# Altium PCB USB_UART_JTAG.PcbDoc
Units mm, origin at the board's own origin, x right, y up, seen from the top; angles counter-clockwise.
Board outline 45 x 40 mm, 2 copper layers (Top Layer, Bottom Layer), stack 1.07 mm thick; 67 components, 49 nets, 247 pads, 152 vias.
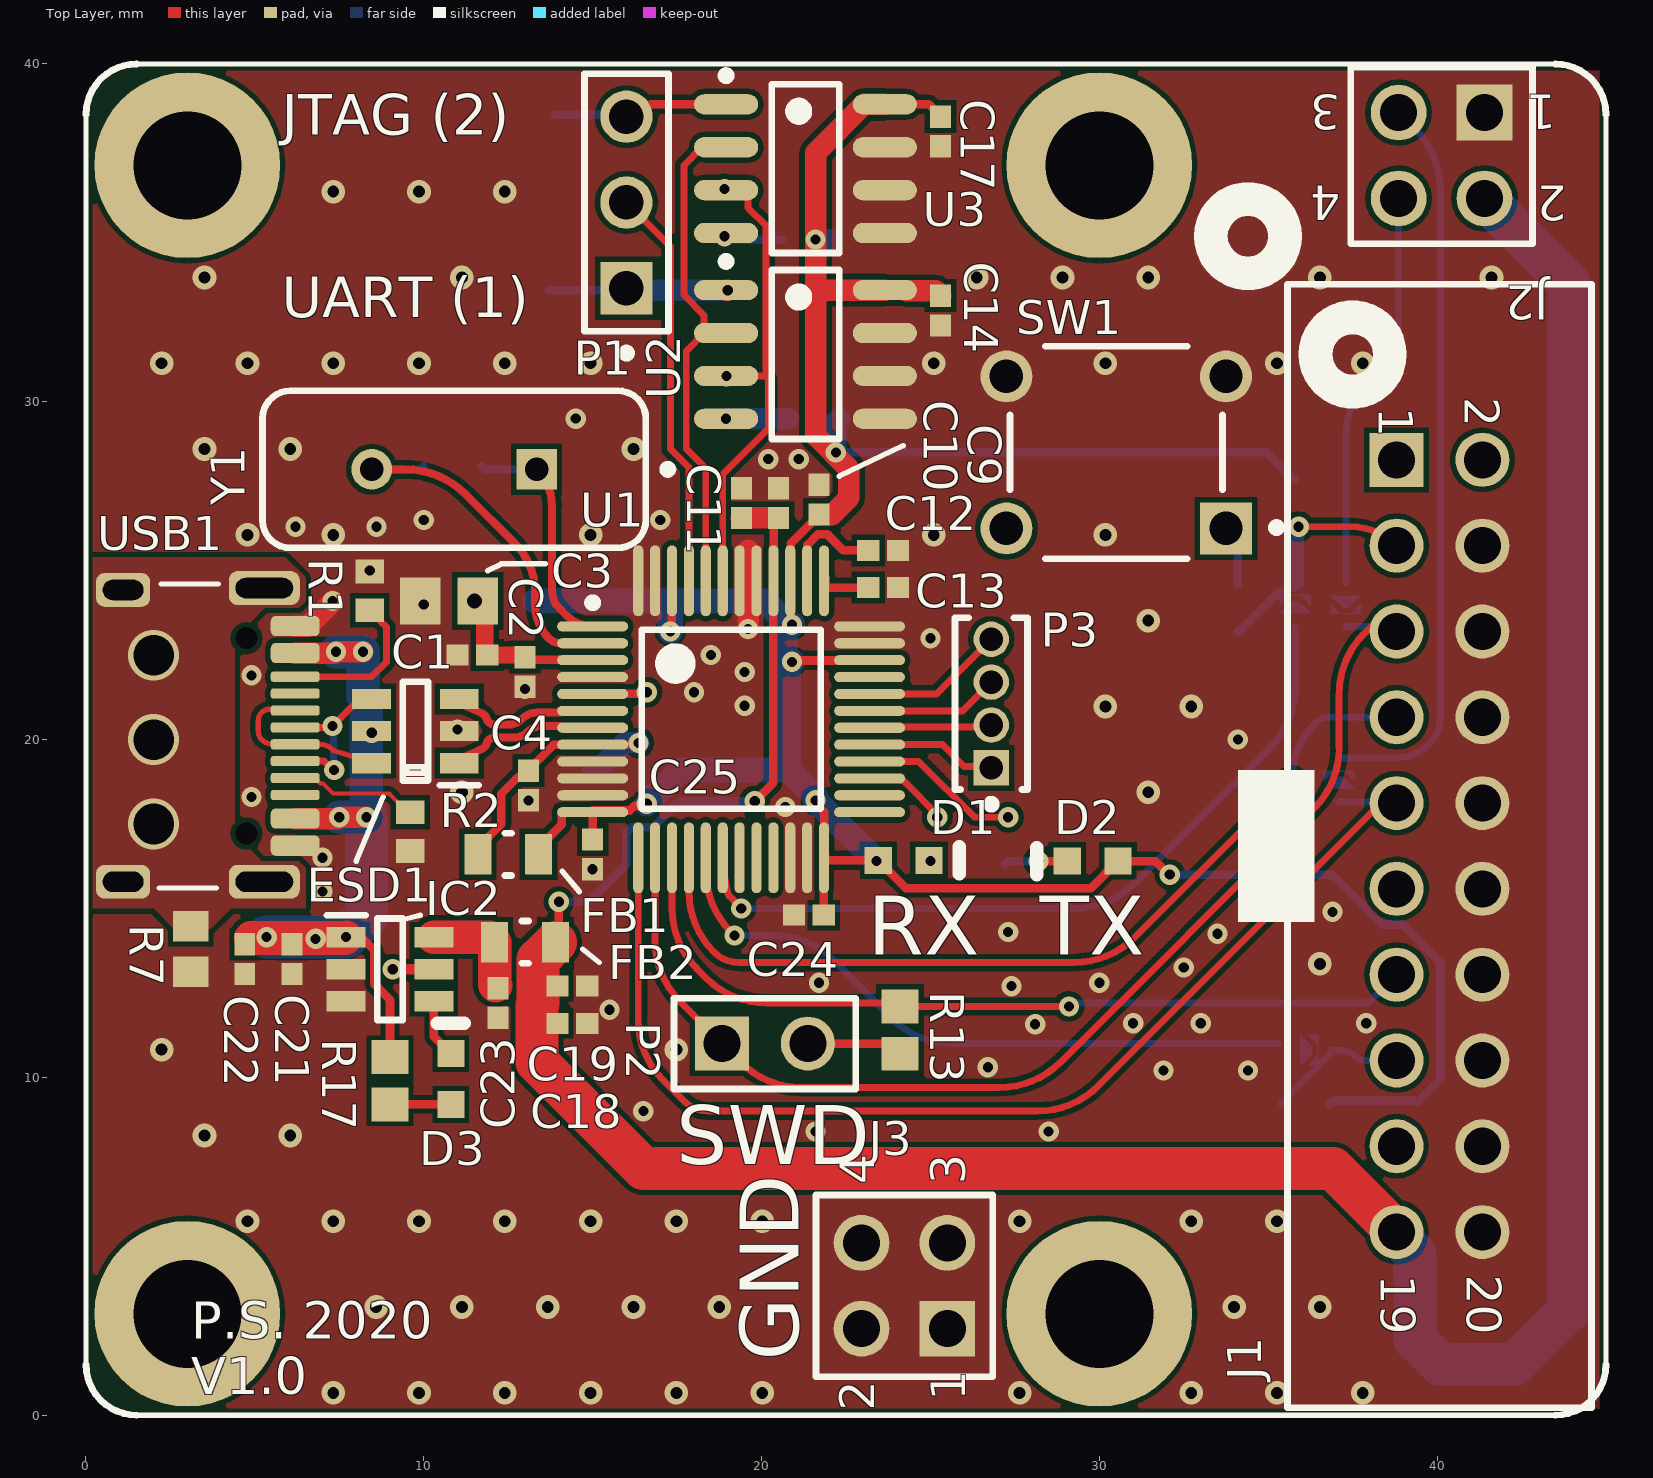
[diagram p0: Top Layer view]
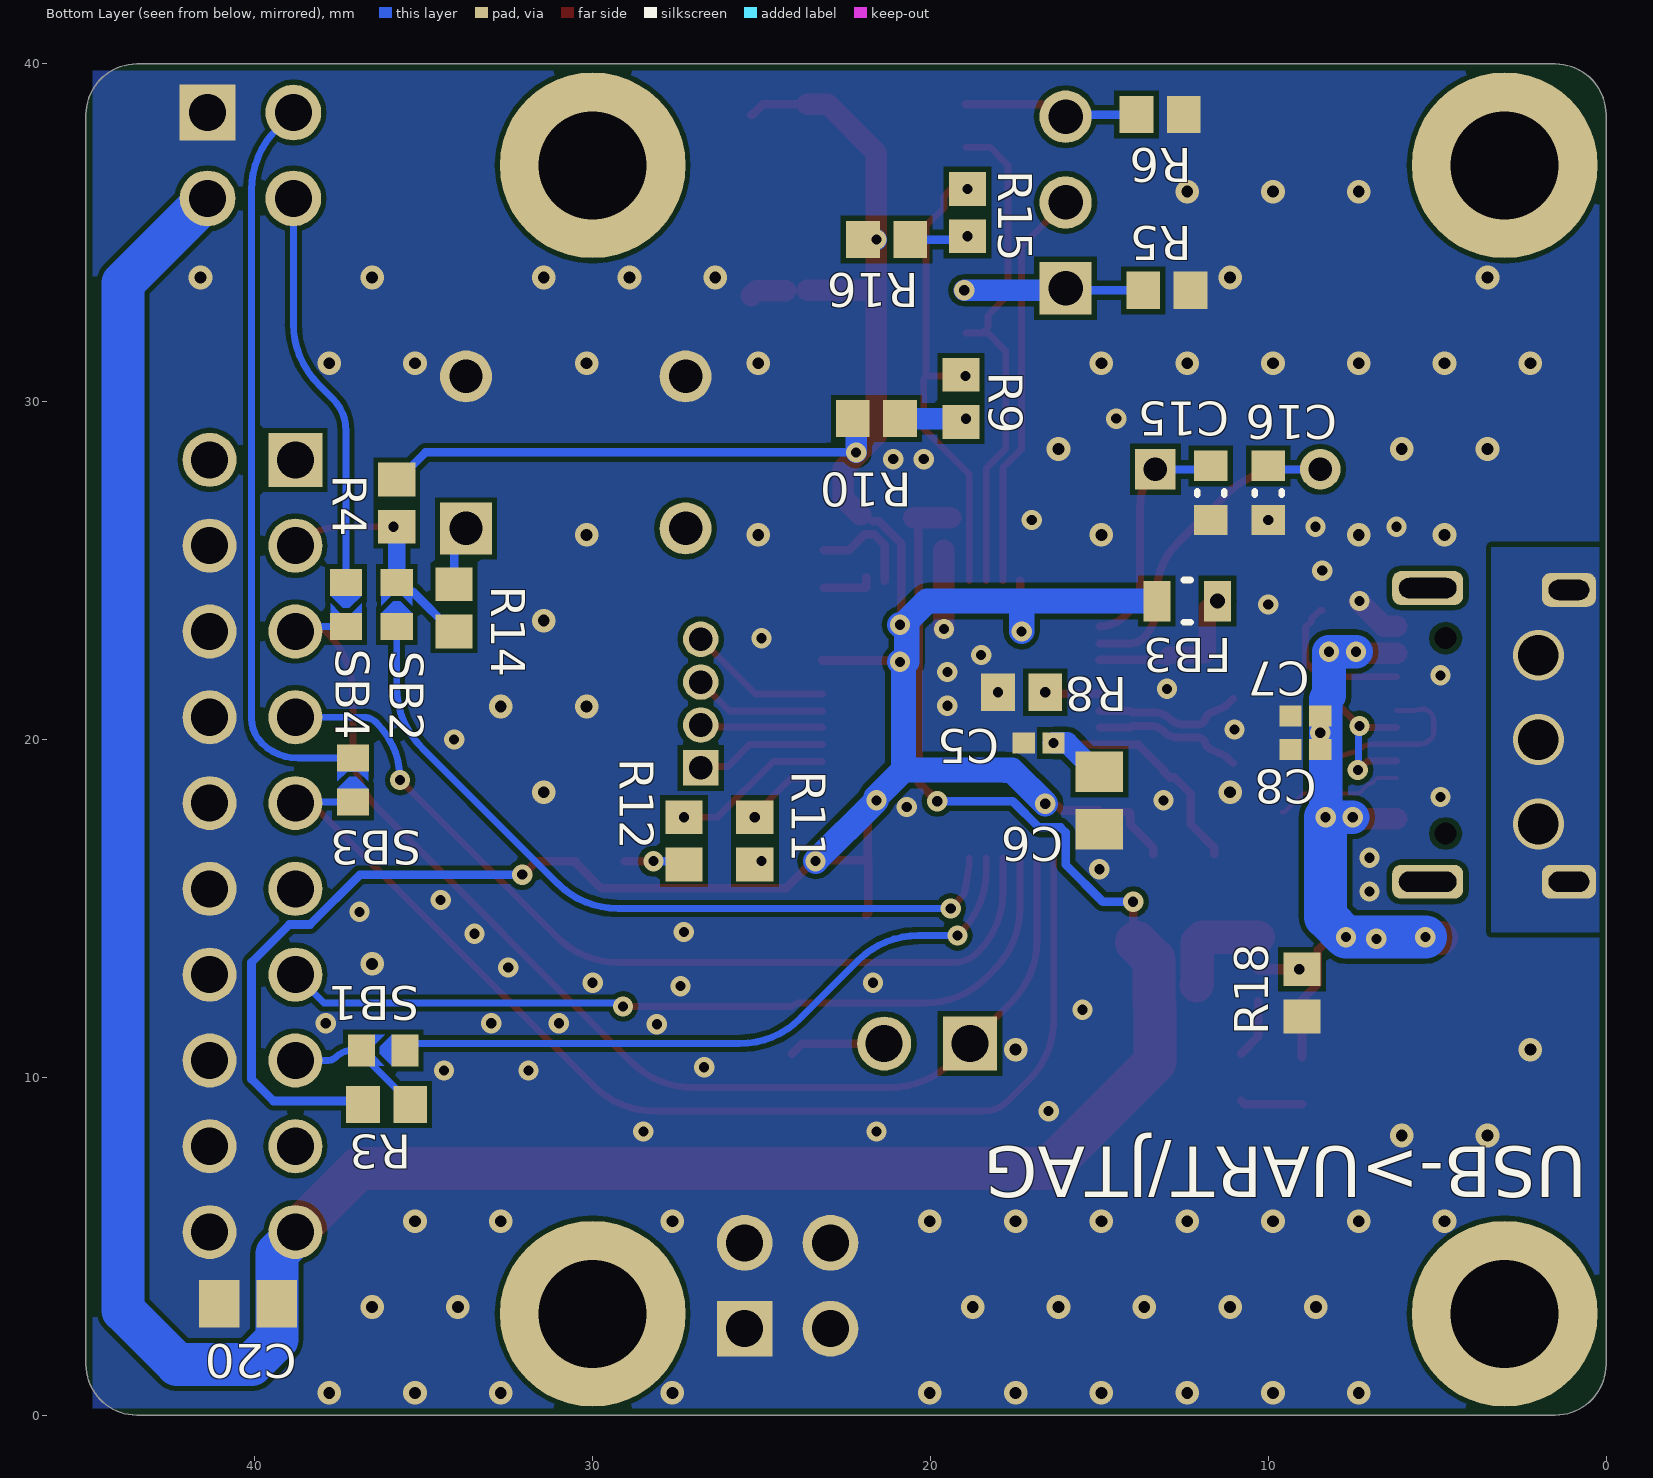
[diagram p1: Bottom Layer view, seen from below]

## Layer stack, top to bottom
Top Solder: solder mask 0.3175, Solder Resist, Dk 3.8
Top Layer: signal copper 0.035
Dielectric 1: dielectric 1, FR-4, Dk 4.5
Bottom Layer: signal copper 0.035
Bottom Solder: solder mask 0.3175, Solder Resist, Dk 3.8

## Board outline
0,1.5 0,38.5 cw(c1.5,38.5) 1.5,40 43.5,40 cw(c43.5,38.5) 45,38.5 45,1.5 cw(c43.5,1.5) 43.5,0 1.5,0 cw(c1.5,1.5)

## Design rules (kind name [scope] priority, off if disabled: settings)
BoardOutlineClearance [All] p1: gap=0.2 ignorepadtopadclearanceinfootprint=FALSE except(0.4: Arc-SplitBarrior Arc-SplitContinuation Track-SplitBarrior Track-SplitContinuation SMDPad-SplitBarrior SMDPad-SplitContinuation THPad-SplitBarrior THPad-SplitContinuation Via-SplitBarrior Via-SplitContinuation Fill-SplitBarrior Fill-SplitContinuation Poly-SplitBarrior Poly-SplitContinuation Region-SplitBarrior Region-SplitContinuation Text-SplitBarrior Text-SplitContinuation)
Clearance "Clearance Bottom Layer" [OnLayer('Bottom Layer')] p1: gap=0.127 ignorepadtopadclearanceinfootprint=TRUE except(0.152: Arc-Via Arc-Fill Arc-Poly Track-Via Track-Fill Track-Poly SMDPad-Via SMDPad-Fill SMDPad-Poly THPad-Via THPad-Fill THPad-Poly Via-Via Via-Fill Via-Poly Fill-Fill Fill-Poly Poly-Poly)
Clearance "Clearance Top Layer" [OnLayer('Top Layer')] p2: gap=0.127 ignorepadtopadclearanceinfootprint=TRUE except(0.152: Arc-Poly Arc-Region Track-Poly Track-Region SMDPad-Poly SMDPad-Region THPad-Poly THPad-Region Via-Poly Via-Region Fill-Poly Fill-Region Poly-Poly Poly-Region Region-Region)
Clearance [All] p3: gap=0.2 ignorepadtopadclearanceinfootprint=FALSE except(0.089: Arc-Arc Arc-Track Arc-SMDPad Track-Track Track-SMDPad SMDPad-SMDPad; 0.127: Arc-Via Track-Via SMDPad-Via THPad-Via Via-Via; 0.254: Arc-Text Track-Text SMDPad-Text THPad-Text Via-Text Fill-Text Poly-Text Region-Text Text-Text)
DiffPairsRouting [All] p1: maxlimit=0.254 minlimit=0.152 mostfreqgap=0.152 toplayer_minwidth=0.236 toplayer_maxwidth=0.381 toplayer_prefwidth=0.236 bottomlayer_minwidth=0.236 bottomlayer_maxwidth=0.381 bottomlayer_prefwidth=0.236 impedanceprofiledriven=TRUE impedanceprofileid={7623FF45-9F71-447D-AFD3-647EBFA47D5D} impedanceprofilevalue=90.000000 maxuncoupledlength=12.7
Height [All] p1: minheight=0 maxheight=254 prefheight=12.7
HoleSize [All] p1: absolutevalues=TRUE maxlimit=6.3 minlimit=0.2 maxpercent=80.000 minpercent=20.000
MinimumAnnularRing [All] p1: minimumring=0.076
MinimumSolderMaskSliver [All] p1: minsoldermaskwidth=0.1
PlaneConnect [All] p1: planeconnectstyle=Direct reliefexpansion=0.508 reliefentries=4 reliefconductorwidth=0.254 reliefairgap=0.254
PolygonConnect PolygonConnect_1 [All] p1: connectstyle=Direct reliefconductorwidth=0.508 reliefentries=4 polygonreliefangle="90 Angle" airgapwidth=0.254
RoutingCorners [All] p1: cornerstyle=Round minsetback=2.54 maxsetback=2.54
RoutingVias [All] p1: holewidth=0.5 width=1 viastyle="Through Hole" minholewidth=0.2 minwidth=0.45 maxholewidth=1 maxwidth=2
SilkToSilkClearance [All] p1: silktosilkclearance=0.1
SilkToSolderMaskClearance [IsPad] p1: minsilkscreentomaskgap=0.1 clearancetoexposedcopper=TRUE
SolderMaskExpansion via [(ObjectKind = 'Via') And (AsMM(HoleDiameter) < 0.5)] p1: expansion=0 istentingtop=FALSE soldermaskfromhole=TRUE
SolderMaskExpansion [All] p2: expansion=0.05 istentingtop=FALSE
Width [All] p1: maxlimit=25.4 minlimit=0.127 preferedwidth=0.152
22 further rules are at their usual default settings.

## Classes and differential pairs
differential pair USB: +USB_P -USB_N

## Components (designator, comment, footprint, x,y, rotation, side; value= is the part's Value field where it differs from the comment)
C1 "100n/10 X7R 0402" CAPC1005X55X25NL05T10 11.44,22.5 r0 top
C2 "1n/50 X7R 0402" CAPC1005X55X25NL05T10 13,22 r90 top
C3 "10u/10 0805" CAPC2013X135X50NL10T20 10.75,24.1 r0 top
C4 "1u/10 X7R 0402" CAPC1005X55X25NL05T10 13.1,18.64 r90 top
C5 "1n/50 X7R 0402" CAPC1005X55X25NL05T10 16.8,19.9 r180 bottom
C6 "10u/10 0805" CAPC2013X135X50NL10T20 15,18.2 r90 bottom
C7 "1u/10 X7R 0402" CAPC1005X55X25NL05T10 8.9,20.7 r180 bottom
C8 "100n/50 X7R 0402" CAPC1005X55X25NL05T10 8.9,19.7 r180 bottom
C9 "100n/50 X7R 0402" CAPC1005X55X25NL05T10 21.7,27.1 r270 top
C10 "1u/10 X7R 0402" CAPC1005X55X25NL05T10 20.5,27 r270 top
C11 "100n/50 X7R 0402" CAPC1005X55X25NL05T10 19.4,27 r270 top
C12 "100n/50 X7R 0402" CAPC1005X55X25NL05T10 23.6,25.6 r180 top
C13 "100n/50 X7R 0402" CAPC1005X55X25NL05T10 23.6,24.5 r180 top
C14 "100n/50 X7R 0402" CAPC1005X55X25NL05T10 25.3,32.7 r90 top
C15 "CAP 20pF 50V 0603(1608)" CAPC0603(1608)100_N 11.7,27.3 r90 bottom value=20pF
C16 "CAP 20pF 50V 0603(1608)" CAPC0603(1608)100_N 10,27.3 r90 bottom value=20pF
C17 "100n/50 X7R 0402" CAPC1005X55X25NL05T10 25.3,38 r90 top
C18 "1u/10 X7R 0402" CAPC1005X55X25NL05T10 14.4,11.6 r180 top
C19 "100n/50 X7R 0402" CAPC1005X55X25NL05T10 14.4,12.7 r180 top
C20 "10u/10 0805" CAPC2013X135X50NL10T20 40.2,3.3 r180 bottom
C21 "1u/10 X7R 0402" CAPC1005X55X25NL05T10 6.1,13.5 r90 top
C22 "100n/50 X7R 0402" CAPC1005X55X25NL05T10 4.7,13.5 r90 top
C23 "100n/10 X7R 0402" CAPC1005X55X25NL05T10 12.2,12.2 r90 top
C24 "100n/50 X7R 0402" CAPC1005X55X25NL05T10 21.4,14.8 r0 top
C25 "100n/50 X7R 0402" CAPC1005X55X25NL05T10 15,16.6 r90 top
D1 "LG L29K-F2J1-24" "OSRM-LG L29K-F2J1-24_V" 24.205,16.421 r0 top
D2 "LG L29K-F2J1-24" "OSRM-LG L29K-F2J1-24_V" 29.8,16.4 r180 top
D3 "LG L29K-F2J1-24" "OSRM-LG L29K-F2J1-24_V" 10.8,9.95 r90 top
ESD1 "USBLC6-2SC6" SOT95P280X145-6N 9.75,20.25 r180 top
FB1 "600R 1A 0805" TDK-MPZ2012_V 12.5,16.6 r180 top
FB2 "600R 1A 0805" TDK-MPZ2012_V 13,14 r0 top
FB3 "600R 1A 0805" TDK-MPZ2012_V 12.4,24.1 r180 bottom
IC2 "AP2552AW6-7" SOT95P285X140-6N 9,13.2 r0 top
J1 "61202021621" 61202021621 40.07,16.85 r270 top
J2 "61300421121" 61300421121 40.13,37.29 r180 top
J3 "61300421121" 61300421121 24.23,3.83 r90 top
P1 "22-28-4033" MOLX-22-28-4033_V 16,35.9 r90 top
P2 "61300211121" 61300211121 20.1,11 r0 top
P3 "GRPB041VWVN-RC" SLIN-GRPB041VWVN-RC_V 26.8,21.065 r90 top
R1 "5k1 1% 0603" RESC1609X50X30LL10T20 8.4,24.4 r90 top
R2 "5k1 1% 0603" RESC1609X50X30LL10T20 9.6,17.275 r270 top
R3 "2k7 5% 0603" RESC1608X55X30ML20T20 36.1,9.2 r0 bottom
R4 "2k7 5% 0603" RESC1608X55X30ML20T20 35.8,27 r90 bottom
R5 "2k7 5% 0603" RESC1608X55X30ML20T20 13,33.3 r180 bottom
R6 "2k7 5% 0603" RESC1608X55X30ML20T20 13.2,38.5 r180 bottom
R7 "100k 5% 0603" RESC1609X50X30ML10T20 3.1,13.8 r90 top
R8 "12k 1% 0603" RESC1608X55X30ML20T20 17.3,21.4 r0 bottom
R9 "2k7 5% 0603" RESC1608X55X30ML20T20 19.1,30.1 r90 bottom
R10 "2k7 5% 0603" RESC1608X55X30ML20T20 21.6,29.5 r0 bottom
R11 "680R 5% 0603" RESC1608X55X30ML20T20 25.2,17 r270 bottom
R12 "680R 5% 0603" RESC1608X55X30ML20T20 27.3,17 r270 bottom
R13 "2k7 5% 0603" RESC1608X55X30ML20T20 24.1,11.4 r270 top
R14 "2k7 5% 0603" RESC1608X55X30ML20T20 34.1,23.9 r270 bottom
R15 "2k7 5% 0603" RESC1608X55X30ML20T20 18.9,35.6 r90 bottom
R16 "2k7 5% 0603" RESC1608X55X30ML20T20 21.3,34.8 r0 bottom
R17 "680R 5% 0603" RESC1608X55X30ML20T20 9,9.9 r90 top
R18 "2k7 5% 0603" RESC1608X55X30ML20T20 9,12.5 r90 bottom
SB1 "0R" SB0603 36.2,10.8 r180 bottom
SB2 "0R" SB0603 35.8,24 r270 bottom
SB3 "0R" SB0603 37.1,18.8 r270 bottom
SB4 "0R" SB0603 37.3,24 r90 bottom
SW1 "3-1825910-1" FP-3-1825910-1-MFG 30.5,28.5 r180 top
U1 "FT232HL-Reel" LQFP-48_M 19.1,20.6 r0 top
U2 "93LC56B-I/SN" SOIC-SN8_L 21.3,31.4 r0 top
U3 "93LC56B-I/SN" SOIC-SN8_L 21.3,36.9 r0 top
USB1 "USB C 2.0 12pin" USB_C_12pin 6.92,20.11 r90 top
Y1 "FOXSLF/160-20" FOX-FOXSLF160-20 10.9,28 r180 top

## Footprints (in the part's own frame and the unit in brackets; to place one, negate y for a bottom-side part, rotate by r counter-clockwise, add the part's x,y. Pads: shape width x height; smd on the part's side, far side on the other; paste and mask are expansions set on the pad)
61202021621 [mm] "20 pins, straight, gold plating"
  rect 1.6x1.6 hole 1.1: 1(-11.43,-1.27)
  round 1.6 hole 1.1: 2(-11.43,1.27) 3(-8.89,-1.27) 4(-8.89,1.27) 5(-6.35,-1.27) 6(-6.35,1.27) 7(-3.81,-1.27) 8(-3.81,1.27) 9(-1.27,-1.27) 10(-1.27,1.27) 11(1.27,-1.27) 12(1.27,1.27) 13(3.81,-1.27) 14(3.81,1.27) 15(6.35,-1.27) 16(6.35,1.27) 17(8.89,-1.27) 18(8.89,1.27) 19(11.43,-1.27) 20(11.43,1.27)
  silkscreen extent -16.63,-4.5 16.63,4.5, body extent -16.53,-4.42 16.53,4.75, height 9.13
61300211121 [mm] "Pin Header, pitch 2.54 mm, THT, Vertical, single row, 2p"
  rect 1.6x1.6 hole 1.1: 1(-1.27,0)
  round 1.6 hole 1.1: 2(1.27,0)
  silkscreen extent -2.69,-1.35 2.69,1.35, body extent -2.54,-1.27 2.54,1.27, height 8.57
61300421121 [mm] "Pin Header, pitch 2.54 mm, THT, Vertical, dual row, 4p"
  rect 1.65x1.65 hole 1.1: 1(-1.27,-1.27)
  round 1.65 hole 1.1: 2(-1.27,1.27) 3(1.27,-1.27) 4(1.27,1.27)
  silkscreen extent -2.69,-2.62 2.69,2.62, body extent -2.54,-2.54 2.54,2.54, height 8.59
CAPC0603(1608)100_N [mm] "Chip Capacitor, Body 1.6x0.8mm, Height 1.0mm, IPC Medium Density"
  rect 0.9x1 smd: 1(-0.8,0) 2(0.8,0)
  silkscreen extent -0.05,-0.4 0.05,0.4, body extent -0.87,-0.48 0.88,0.47, height 1
CAPC1005X55X25NL05T10 [mm] "Chip Capacitor, 2-Leads, Body 1.00x0.50mm, IPC Medium Density"
  rect 0.66x0.62 smd: 1(-0.44,0) 2(0.44,0)
  body extent -0.53,-0.28 0.53,0.27, height 0.55
CAPC2013X135X50NL10T20 [mm] "Chip Capacitor, 2-Leads, Body 2.00x1.25mm, IPC Medium Density"
  rect 1.2x1.4 smd: 1(-0.85,0) 2(0.85,0)
  body extent -1.05,-0.67 1.05,0.67, height 1.35
FOX-FOXSLF160-20 [mm] "THD, 2-Leads, Body 11.35x4.65mm"
  rect 1.2x1.2 hole 0.7: 1(-2.44,0)
  round 1.2 hole 0.7: 2(2.44,0)
  silkscreen extent -6.45,-2.32 5.68,2.32, body extent -5.67,-2.32 5.68,2.33, height 3.6
FP-3-1825910-1-MFG [mm]
  rect 1.54x1.54 hole 0.99 paste-1000 mask+0: 1(-3.25,2.25)
  round 1.54 hole 0.99 paste-1000 mask+0: 2(3.25,2.25) 3(-3.25,-2.25) 4(3.25,-2.25)
  silkscreen extent -4.87,-3.15 3.15,3.15, body extent -4.12,-3.24 4.12,3.24, height 0.25
LQFP-48_M [mm] "Thin QFP, 48-Leads, Body 7x7mm, Pitch 0.5mm, IPC Low Density"
  oval 2.1x0.3 smd: 1(-4.1,2.75) 2(-4.1,2.25) 3(-4.1,1.75) 4(-4.1,1.25) 5(-4.1,0.75) 6(-4.1,0.25) 7(-4.1,-0.25) 8(-4.1,-0.75) 9(-4.1,-1.25) 10(-4.1,-1.75) 11(-4.1,-2.25) 12(-4.1,-2.75) 25(4.1,-2.75) 26(4.1,-2.25) 27(4.1,-1.75) 28(4.1,-1.25) 29(4.1,-0.75) 30(4.1,-0.25) 31(4.1,0.25) 32(4.1,0.75) 33(4.1,1.25) 34(4.1,1.75) 35(4.1,2.25) 36(4.1,2.75)
  oval 0.3x2.1 smd: 13(-2.75,-4.1) 14(-2.25,-4.1) 15(-1.75,-4.1) 16(-1.25,-4.1) 17(-0.75,-4.1) 18(-0.25,-4.1) 19(0.25,-4.1) 20(0.75,-4.1) 21(1.25,-4.1) 22(1.75,-4.1) 23(2.25,-4.1) 24(2.75,-4.1) 37(2.75,4.1) 38(2.25,4.1) 39(1.75,4.1) 40(1.25,4.1) 41(0.75,4.1) 42(0.25,4.1) 43(-0.25,4.1) 44(-0.75,4.1) 45(-1.25,4.1) 46(-1.75,4.1) 47(-2.25,4.1) 48(-2.75,4.1)
  silkscreen extent -4.22,-2.65 2.65,3.57, body extent -3.5,-3.5 3.5,3.5, height 1.6
MOLX-22-28-4033_V [mm] "THD, 3-Leads, Body 7.62x2.49mm, Pitch 2.54mm"
  rect 1.55x1.55 hole 1.02: 1(-2.54,0)
  round 1.55 hole 1.02: 2(0,0) 3(2.54,0)
  silkscreen extent -4.58,-1.24 3.81,1.24, body extent -3.81,-1.24 3.81,1.24, height 8.38
"OSRM-LG L29K-F2J1-24_V" [mm] "SMD, 2-Leads, Body 1.3x0.8mm, Height 0.67mm"
  rect 0.8x0.8 smd paste-0.2: 1(-0.75,0) 2(0.75,0)
  silkscreen extent 1.65,-0.4 1.65,0.4, body extent -0.85,-0.4 0.85,0.4, height 0.67
RESC1608X55X30ML20T20 [mm] "Chip Resistor, 2-Leads, Body 1.60x0.80mm, IPC Low Density"
  rect 1x1.1 smd: 1(-0.7,0) 2(0.7,0)
  body extent -0.9,-0.5 0.9,0.5, height 0.55
RESC1609X50X30LL10T20 [mm] "Chip Resistor, 2-Leads, Body 1.55x0.85mm, IPC High Density"
  rect 0.7x0.85 smd: 1(-0.575,0) 2(0.575,0)
  body extent -0.82,-0.48 0.82,0.48, height 0.5
RESC1609X50X30ML10T20 [mm] "Chip Resistor, 2-Leads, Body 1.55x0.85mm, IPC Low Density"
  rect 0.9x1.05 smd: 1(-0.675,0) 2(0.675,0)
  body extent -0.82,-0.48 0.82,0.48, height 0.5
SB0603 [mm] "Chip Resistor, 2-Leads, Body 1.65x0.95mm, IPC Medium Density"
  rect 0.8x0.95 smd: 1(-0.65,0) 2(0.65,0)
  Top Layer region: -0.102,0.102 0.254,0.457 0.254,-0.457 -0.102,-0.102
  Top Layer region: 0.038,0.457 -0.279,0.457 -0.279,-0.432 -0.254,-0.457 0.036,-0.457 -0.254,-0.168 -0.254,0.165
  body extent -0.83,-0.47 0.82,0.48, height 0.5
SLIN-GRPB041VWVN-RC_V [mm] "Header, 4-Leads, Body 5.08x2.14mm, Pitch 1.27mm"
  rect 1.05x1.05 hole 0.7: 1(-1.905,0)
  round 1.05 hole 0.7: 2(-0.635,0) 3(0.635,0) 4(1.905,0)
  silkscreen extent -3.1,-1.07 2.54,1.07, body extent -2.54,-1.07 2.54,1.07, height 4
SOIC-SN8_L [mm] "SOIC, 8-Leads, Body 4.9x3.9mm, Pitch 1.27mm, IPC High Density"
  oval 1.9x0.6 smd: 1(-2.35,1.905) 2(-2.35,0.635) 3(-2.35,-0.635) 4(-2.35,-1.905) 5(2.35,-1.905) 6(2.35,-0.635) 7(2.35,0.635) 8(2.35,1.905)
  silkscreen extent -2.47,-2.5 1,2.88, body extent -2,-2.5 2,2.5, height 1.75
SOT95P280X145-6N [mm]
  rect 1.15x0.6 smd: 1(-1.3,0.95) 2(-1.3,0) 3(-1.3,-0.95) 4(1.3,-0.95) 5(1.3,0) 6(1.3,0.95)
  silkscreen extent -1.88,-1.46 0.38,1.6, body extent -1.4,-1.46 1.4,1.46, height 1.45
SOT95P285X140-6N [mm]
  rect 1.15x0.6 smd: 1(-1.3,0.95) 2(-1.3,0) 3(-1.3,-0.95) 4(1.3,-0.95) 5(1.3,0) 6(1.3,0.95)
  silkscreen extent -1.88,-1.5 0.38,1.6, body extent -1.43,-1.5 1.43,1.5, height 1.4
TDK-MPZ2012_V [mm] "SMD, 2-Leads, Body 2x1.25mm"
  rect 0.8x1.2 smd: 1(-0.9,0) 2(0.9,0)
  silkscreen extent -0.1,-0.63 0.1,0.63, body extent -1,-0.63 1,0.63, height 1.05
USB_C_12pin [mm]
  round 0 hole 0.65 unplated paste+0 mask+0: 57(-2.89,2.17) 57(2.89,2.17)
  rrect50% 0.6x1.45 smd: A1_B12(-3.25,0.725) A4_B9(-2.45,0.725) B1_A12(3.25,0.725) B4_A9(2.45,0.725)
  rrect50% 0.3x1.45 smd: A5(-1.25,0.725) A6(-0.25,0.725) A7(0.25,0.725) A8(1.25,0.725) B5(1.75,0.725) B6(0.75,0.725) B7(-0.75,0.725) B8(-1.75,0.725)
  rrect50% 1x2.1 hole 0.6 slot 1.7 at 90 deg: S1(4.375,1.64) S2(-4.32,1.64)
  rrect50% 1x1.6 hole 0.6 slot 1.2 at 90 deg: S3(-4.32,5.82) S4(4.32,5.82)
  silkscreen extent -4.5,3 4.5,4.75, body extent -4.47,0.53 4.47,8.43, height 3.2

## Part data
C1 C2 C4 C5 C7 C8 C9 C10 C11 C12 C13 C14 C17 C18 C19 C21 C22 C23 C24 C25: library part CMP-2008-04580-1, Manufacturer=Murata, Part Number=GRM155R61E104KA87D
C3 C6 C20: library part CMP-2007-03453-1, Manufacturer=Murata, Part Number=GRM21BR61C106KE15L
C15 C16: library part CMP-1035-00783-1, "CAP 20pF 50V ±5% 0603 (1608 Metric) Thickness 1mm SMD", Case-EIA=0603, Case-Metric=1608, Rated Voltage="50 V", Tolerance=Â±5%, Max Thickness="1 mm", Technology=SMT
D1 D2 D3: library part CMP-2000-07461-1, "SmartLED, Green, 1.7 V, 1.4 to 5.6 MCD, -40 to 100 degC, 2-Pin SMD, RoHS, Tape and Reel", Case Code (Imperial)=0603, Case Code (Metric)=1608, Colour=Green, Forward Current=20mA, Forward Voltage=1.7V, Lens Colour=Clear, Manufacturer="Osram Opto", Max Operating Temperature=100degC, Min Operating Temperature=-40degC, Package Description="2-Pin Surface Mount Device, Body 0.8 x 1.3 mm", Package Quantity=1, Test Current=2mA, Case\/Package=0603, Contact Plating=Matte, Datasheet URL=http://datasheet.octopart.com/LG-L29K-F2J1-24-Osram-datasheet-41480516.pdf, Datasheet Version=10/2012, Depth=0.8mm, Dominant Wavelength=570nm, Height=0.65mm, Lead Free=LeadFree, Length=1.7mm, Lens Style=Rectangular, Lens Transparency=Diffused, Luminous Flux=0.015lm, Luminous Intensity=3.5mcd, Manufacturer URL=https://www.osram.com/os/, Mount=SurfaceMount, Mounting Technology=SurfaceMount, Number of Elements=1, Number of LEDs=1, Number of Pins=2, Package Reference="LG L29K-F2J1-24", Packaging=TapeandReel, Radiation Hardening=No, RoHSCompliant=true, Viewing Angle=160degrees, Wavelength=570nm, Width=0.8mm
ESD1: "Integrated Circuit", Manufacturer_Name=STMicroelectronics, Mouser Part Number=511-USBLC6-2SC6, Arrow Part Number=USBLC6-2SC6, Arrow Price/Stock=https://www.arrow.com/en/products/usblc6-2sc6/stmicroelectronics, Datasheet Link=http://www.st.com/st-web-ui/static/active/en/resource/technical/document/datasheet/CD00050750.pdf, Height=1.45mm, Manufacturer_Part_Number=USBLC6-2SC6, Mouser Price/Stock=https://www.mouser.co.uk/ProductDetail/STMicroelectronics/USBLC6-2SC6?qs=po45yt2pPpu%2FhNIlwQdTlg%3D%3D
FB1 FB2 FB3: library part CMP-2000-05401-1, "Chip Bead, 0.1 Ohm, 2 A, -55 to 125 degC, 2-Pin SMD (0805), RoHS, Tape and Reel", Current Rating=2A, DC Resistance (DCR)=100mOhmMax, Impedance @ Frequency=600Ohm@100MHz, Manufacturer=TDK, Package / Case=0805(2012Metric), Package Description="2-Pin Surface Mount Device, Body 2 x 1.25 mm", Package Reference=805, PCN Part Number=MMZ,MPSSeriesOct/2014, Standard Package=1, Catalog Drawings="(MMZ,MPZ)2012SeriesTop /  / (MMZ,MPZ)2012SeriesFootprint /  / (MMZ,MPZ)2012SeriesSide", Category=Filters, Datasheet URL=http://datasheet.octopart.com/MPZ2012S601AT000-TDK-datasheet-12512619.pdf, Datasheet Version=Sep-12, Family=FerriteBeadsandChips, Filter Type=DifferentialMode-Single, Height (Max)="0.041\"(1.05mm)", Manufacturer URL=http://www.tdk.com/, Mounting Type=SurfaceMount, Online Catalog=MPZ2012Series, Other Names=445-2206-6, Packaging=Digi-Reel, Product Training Modules=EMCComponents, Series=MPZ, Size / Dimension="0.079\"Lx0.049\"W(2.00mmx1.25mm)"
IC2: "Integrated Circuit", Manufacturer_Name="Diodes Inc.", Mouser Part Number=621-AP2552AW6-7, Arrow Part Number=AP2552AW6-7, Datasheet Link=https://www.diodes.com/assets/Datasheets/AP255x.pdf, Height=1.4mm, Manufacturer_Part_Number=AP2552AW6-7, Mouser Price/Stock=https://www.mouser.co.uk/ProductDetail/Diodes-Incorporated/AP2552AW6-7?qs=wo71MgyKIyGuD7yeQlWo%2Fw%3D%3D
J1: library part CMP-1502-00010-1, "Male Box Header WR-BHD, THT, Vertical, pitch 2.54 mm, 20 pins", Contact Resistance=20mOhm, Manufacturer="Wurth Elektronik", Operating Temperature=-40to125degC, Withstanding Voltage=500VAC, Working Voltage=250VAC, Datasheet URL=https://katalog.we-online.de/em/datasheet/6120xx21621.pdf, Gender=Male, Manufacturer URL=http://www.we-online.de, Mounting Technology=THT, Orientation=Vertical, Package Reference=61202021621, Packaging=Tray, Part Number=61202021621, Pin Number=20, Pitch=2.54mm, Published Date=August2018, Publisher=WurthElektronik
J2 J3: library part CMP-1502-01066-1, "THT Vertical Pin Header WR-PHD, Pitch 2.54 mm, Dual Row, 4 pins", Contact Resistance=20mOhm, Manufacturer="Wurth Elektronik", Operating Temperature=-40to105degC, Rated Current=3A, Withstanding Voltage=500VAC, Working Voltage=250VAC, Datasheet URL=https://katalog.we-online.de/em/datasheet/6130xx21121.pdf, Gender=Male, Manufacturer URL=http://www.we-online.de, Mounting Technology=THT, Orientation=Vertical, Package Reference=61300421121, Packaging=Bag, Part Number=61300421121, Pin Number=4, Pitch=2.54mm, Publisher=WurthElektronik, Row Number=Dual
P1: library part CMP-1676-00001-5, "Male Header, Pitch 2.54 mm, 1 x 3 Position, Height 8.38 mm, Tail Length 3.18 mm, RoHS, Bulk", Colour=Black, Current Rating="4 A", Manufacturer=Molex, Max Operating Temperature="75 degC", Min Operating Temperature="0 degC", Package Quantity=1, Voltage Rating="250 V", ComponentLink1Description="Manufacturer URL", ComponentLink1URL=http://www.molex.com/, ComponentLink2Description=Datasheet, ComponentLink2URL=http://www.molex.com/pdm_docs/sd/022284033_sd.pdf, Contact Finish=Gold, Contact Material=Brass, Contact Plating=Gold, DatasheetVersion="Rev. G, 01/2012", Height="8.38 mm", Lead Pitch="0.1 inch", Length="7.62 mm", Mount="Through Hole", Mounting Technology="Through Hole", PackageDescription="Male Header, Pitch 2.54 mm, 1 x 3 Position, Height 8.38 mm, Tail Length 3.18 mm", PackageReference=22-28-4033, Packaging=Bulk, Pins=3, REACH SVHC=Unknown, RoHSCompliant=true, Rows=1
P2: library part CMP-1502-01060-1, "THT Vertical Pin Header WR-PHD, Pitch 2.54 mm, Single Row, 2 pins", Contact Resistance=20mOhm, Manufacturer="Wurth Elektronik", Operating Temperature=-40to105degC, Rated Current=3A, Withstanding Voltage=500VAC, Working Voltage=250VAC, Datasheet URL=https://katalog.we-online.de/em/datasheet/6130xx11121.pdf, Gender=Male, Manufacturer URL=http://www.we-online.de, Mounting Technology=THT, Orientation=Vertical, Package Reference=61300211121, Packaging=Bag, Part Number=61300211121, Pin Number=2, Pitch=2.54mm, Publisher=WurthElektronik, Row Number=Single
P3: library part CMP-2000-06373-1, "Male Header, Pitch 1.27 mm, 1 x 4 Position, Height 4 mm, Tail Length 2.3 mm, -40 to 105 degC, RoHS, Bulk", Manufacturer=Sullins, Package Description="Male Header, Pitch 1.27 mm, 1 x 4 Position, Height 4 mm, Tail Length 2.3 mm", Standard Package=1, Catalog Drawings=S9014ESeriesTop, Category=Connectors,Interconnects, Connector Type=Header,Unshrouded, Contact Finish=Gold, Contact Finish Thickness=Flash, Contact Mating Length="0.118\"(3.00mm)", Contact Type=MalePin, Datasheet URL=http://www.sullinscorp.com/drawings/71_GRPB___1VWVN-RC,_10957-C.pdf, Datasheet Version="Rev. C, 12/2008", Dynamic Catalog=GRPB, Family=RectangularConnectors-Headers,MalePins, Manufacturer URL=http://www.sullinscorp.com/, Mating Products="S9010E-04-ND / -CONNHEADER.050\"4POSR/APCB / S9008E-04-ND / -CONNHEADER.050\"4POSPCBGOLD / S9005E-04-ND / -CONNHEADER.050\"4POSSMDGOLD", Mounting Technology=ThroughHole, Mounting Type=ThroughHole, Number of Positions=4, Number of Positions Loaded=All, Number of Rows=1, Other Names=S9014E-04, Package Reference=GRPB041VWVN-RC, Packaging=Bulk, Pitch="0.050\"(1.27mm)", Termination=Solder
R1 R2: library part CMP-2000-03606-1, Manufacturer="Vishay Dale", Part Number=CRCW060382R0FKEA
R3 R4 R5 R6 R8 R9 R10 R11 R12 R13 R14 R15 R16 R17 R18: library part CMP-2000-00873-1, Manufacturer=Panasonic, Part Number=ERA3AEB102V
R7: library part CMP-2000-03821-1, Manufacturer="Vishay Dale", Part Number=CRCW0603100KFKEB
SB1 SB2 SB3 SB4: library part SB, Manufacturer=Panasonic, Part Number=ERA3AEB102V
SW1: library part CMP-03407-000001-1, "SWITCH TACTILE SPST-NO 0.05A 24V", Contact Current Rating=50mA, Contact Resistance=100mΩ, Manufacturer="TE Connectivity", Operating Force=160gf, Package=0, Temperature="-35°C to +85°C", Temperature Range High=+85°C, Temperature Range Low=-35°C, Automotive=No, Category=Switch, ComponentLink2Description=Datasheet, ComponentLink2URL=https://www.te.com/commerce/DocumentDelivery/DDEController?Action=srchrtrv&DocNm=1825910&DocType=Customer+Drawing&DocLang=English, Device Class L1=Electromechanical, Device Class L2=Switches, Device Class L3="Tactile Switches", Digikey Description="SWITCH TACTILE SPST-NO 0.05A 24V", Electromechanical Life=100000Cycles, Height=17.3mm, Lead Free=Yes, Manufacturer Part Number=3-1825910-1, Mount="Through Hole", Octopart=https://octopart.com/3-1825910-1-te+connectivity-46506874, RoHS=TRUE, Throw Configuration=SPST-NO
U1: library part CMP-0078-00035-3, "Single Channel Hi-Speed USB to Multipurpose UART/FIFO IC, 48-pin LQFP, Tape and Reel", Manufacturer=FTDI, ComponentLink1Description="Manufacturer URL", ComponentLink1URL=http://www.ftdichip.com/, ComponentLink2Description=Datasheet, ComponentLink2URL=http://www.ftdichip.com/Support/Documents/DataSheets/ICs/DS_FT232H.pdf, DatasheetVersion="ver 1.8, Dec-2012", PackageDescription="48-Pin Thin Quad Flat Pack, 7 x 7 mm Body, 0.5 mm Pitch", PackageReference=LQFP-48, PackageVersion=Dec-12, PartNumber=FT232HL-Reel, RevisionNote="DatasheetVersion updated to 1.8 Dec-2012"
U2 U3: library part CMP-0162-00077-1, "2K, 128x16-bit, 2.5V Microwire Serial EEPROM, 8-Pin SOIC 150mil, Industrial Temperature", Code_IPC=SOIC127P600-8, Code_JEDEC=MS-012, DatasheetVersion="revF, May-2008", PackageDescription="8-Lead Plastic Small Outline (SN) - Narrow, 3.90mm Body [SOIC]", PackageReference=SOIC-SN8, PackageVersion="revBB, Aug-2009"
USB1: "USB 2.0 Type C Receptacle WR-COM, Horizontal, SMT / THT", Contact Resistance=30mOhm, Manufacturer="Wurth Elektronik", Operating Temperature=-40to105degC, Package Reference=632723100011, Rated Current=5A, Working Voltage=20VDC, Connector Type=USB3.1TypeC, Datasheet URL=https://katalog.we-online.de/em/datasheet/632723x00011%282%29.pdf, Gender=Receptacle, Manufacturer URL=http://www.we-online.de, Mounting Technology=SMT/THT, Orientation=Horizontal, Packaging=TapeandReel, Part Number=632723100011, Publisher=WurthElektronik
Y1: library part CMP-1749-00003-1, "Resistance Weld Thru-Hole Crystal, 16 MHz, -20 to 70 degC, 2-Pin THD, RoHS, Bulk", Case\Package=Axial, Max Operating Temperature="155 degC", Min Operating Temperature="-55 degC", Package Quantity=200, Power Rating="250 mW", Resistance="221 kohm", Tolerance=1%, Voltage Rating="250 V", ComponentLink1Description="Manufacturer URL", ComponentLink1URL=http://www.foxonline.com/, ComponentLink2Description=Datasheet, ComponentLink2URL=http://www.foxonline.com/pdfs/hc49slf.pdf, DatasheetVersion=Mar-15, Length="0.248 inch", Mount="Through Hole", PackageDescription="2-Pin Through Hole Device, Body 11.35 x 4.65 mm", PackageReference=FOXSLF160-20, Packaging=Bulk, RoHSCompliant=true

## Free pads (board coordinates)
  round 5.5 hole 3.2 mask+0.051: 16(30,37) 17(30,3) 18(3,37) 19(3,3)

## Via types
v1: diameter 0.6, hole 0.3, Top Layer to Bottom Layer, 83 vias
v2: diameter 0.7, hole 0.35, Top Layer to Bottom Layer, 65 vias
v3: diameter 1.5, hole 1.2, Top Layer to Bottom Layer, 3 vias
v4: diameter 0.8, hole 0.45, Top Layer to Bottom Layer, 1 vias

## Nets (pads, with @x,y where several pads share a name; then routed paths per layer and width w, separated by ;. In a path a pad name is that pad's centre, name@x,y a point inside that pad or via, vN(x,y) a via of type N, cw(c..) or ccw(c..) an arc to the next point about the centre after c; other vN are vias at no path point)
+3V3: C9.2 C14.2 C17.2 C24.2 C25.2 D1.1 D2.1 FB1.1 FB3.1 R3.2 R4.2 R10.2 R16.2 U1.12 U1.24 U1.34 U1.39 U1.46 U2.8 U3.8 | length 98.9
  Top Layer w0.254: FB1.1 13.4,16.8 14.091,17.491 14.091,17.829 14.112,17.85 U1.12 ; C25.2 U1.12 ; v1(16.6,18.1) 16.534,18.034 16.234,18.034 16.1,17.9 15,17.9 U1.12 ; v1(17.3,23.2) 17.341,23.241 17.341,24.691 U1.46 ; v1(20.904,22.3) 20.945,22.341 23.191,22.341 U1.34 ; v1(20.904,23.4) 20.859,23.445 20.859,24.691 U1.39 20.859,24.709 20.859,25.799 21.517,26.457 21.697,26.457 C9.2@21.7,26.46 ; v1(21.6,18.2) 21.6,18.106 21.85,17.856 U1.24 21.845,16.495 21.845,14.855 C24.2@21.9,14.8 ; U1.24@21.9,16.5 21.979,16.421 D1.1@23.421,16.421 ; v1(23.4,16.4) D1.1@23.421,16.421 ; U3.8 24.955,38.805 25.26,38.5 C17.2@25.3,38.5 ; D2.1@30.5,16.4 30.5,16.35 29.75,15.6 24.275,15.6 D1.1 D1.1@23.421,16.421 ; D2.1 31.664,16.4 32.064,16 v1(32.084,16)
  Top Layer w0.635: 22.065,26.647 22.076,26.647 22.581,27.153 22.581,28.019 21.6,29 21.6,33.3 ; U2.8 21.605,33.305 21.6,33.3 ; U3.8 23.035,38.805 21.6,37.37 v1(21.6,34.8) 21.6,33.3 ; U2.8@24.283,33.288 25.152,33.288 25.287,33.153 25.292,33.153 25.3,33.145 C14.2
  Bottom Layer w0.254: v1(22.2,28.5) 34.95,28.5 35.75,27.7 R4.2 ; v1(32.084,16) 36.889,16 38.363,14.526 38.974,14.526 40.1,13.4 40.1,9.949 39.451,9.3 36.9,9.3 R3.2
  Bottom Layer w0.635: v1(21.6,34.8) R16.2 ; v1(22.2,28.5) 22.2,29.4 R10.2
  Bottom Layer w0.75: FB3.1 17.3,24.1 ; v1(16.6,18.1) 17.588,19.088 17.778,19.088 17.79,19.1 20.8,19.1 ; v1(17.3,23.2) 17.3,24.1 ; v1@20.7,22.3 v1@20.7,23.4 ; v1(20.904,22.3) 20.8,22.196 20.8,19.1 ; v1(20.904,23.4) 20.8,23.4 20.1,24.1 17.3,24.1 ; v1(23.4,16.4) v1(21.6,18.2) 21.6,18.3 20.8,19.1
+5: C10.2 C11.2 C18.2 C19.2 C20.2 FB2.2 J1.19 J2.2 U1.40 | length 92.8
  Top Layer w0.254: FB2.2@13.8,13.9 14,14.1 v1(14,15.2) ; v1(19.8,18.173) 20.35,18.723 U1.40 20.359,24.709 20.359,26.419 C10.2
  Top Layer w0.635: C11.2 C10.2
  Top Layer w1.27: FB2.2 13.385,13.485 13.385,12.194 13.35,12.16 13.35,10.457 16.507,7.3 36.92,7.3 38.7,5.52 J1.19@38.7,5.5
  Bottom Layer w0.254: v1(14,15.2) 14.9,15.2 16,16.3 16,17.251 16.149,17.4 16.79,17.4 17.562,18.173 v1(19.8,18.173)
  Bottom Layer w1.27: J1.19 38.8,5.331 39.35,4.781 C20.2 39.35,2.244 40.094,1.5 42.3,1.5 43.9,3.1 43.9,33.52 J2.2
GND: C1.1 C2.1 C3.1 C4.1 C5.1 C6.1 C7.1 C8.1 C9.1 C10.1 C11.1 C12.1 C13.1 C14.1 C15.1 C16.1 C17.1 C18.1 C19.1 C20.1 C21.1 C22.1 C23.1 C24.1 C25.1 ESD1.2 IC2.2 IC2.3 J1.4 J1.6 J1.8 J1.10 J1.12 J1.14 J1.16 J1.18 J1.20 J2.1 J3.1 J3.2 J3.3 J3.4 R1.2 R2.2 R5.2 R6.2 R7.1 R8.2 R18.1 SW1.3 SW1.4 U1.4 U1.9 U1.10 U1.11 U1.22 U1.23 U1.35 U1.36 U1.41 U1.42 U1.47 U1.48 U2.5 U2.6 U2.7 U3.5 U3.6 U3.7 USB1.A1_B12 USB1.B1_A12 | length 6.5
  Top Layer w0.635: USB1.B1_A12 6.585,23.36 7.3,24.075 v1(7.3,24.1) ; v1(19.6,23.273) 19.6,25.6 ; 19.6,24.7 19.6,25.6 ; 19.6,24.7 19.6,25.6 ; 19.6,24.7 19.6,25.6
  other v1: 21.6,8.4 28.5,8.4 16.5,9 31.9,10.2 34.4,10.2 26.7,10.3 28.1,11.571 31,11.6 33,11.6 37.9,11.6 15.5,12 27.4,12.7 21.7,12.8 30,12.8 32.5,13.25 33.5,14.25 27.3,14.3 36.9,14.9 34.5,15.25 7,15.5 15,16.16 7,16.5 20.7,18 13.1,18.2 4.9,18.3 34.1,20 11,20.3 19.5,21 18,21.4 13,21.5 4.9,21.9 19.5,22 18.5,22.5 25,23 10,24 8.4,25 6.2,26.3 8.6,26.3 10,26.5 17,26.5 20.2,28.3 21.1,28.3 14.5,29.5
  other v2: 7.32,0.66 9.86,0.66 12.4,0.66 14.94,0.66 17.48,0.66 20.02,0.66 27.64,0.66 32.72,0.66 35.26,0.66 37.8,0.66 8.59,3.2 11.13,3.2 13.67,3.2 16.21,3.2 18.75,3.2 33.99,3.2 36.53,3.2 4.78,5.74 7.32,5.74 9.86,5.74 12.4,5.74 14.94,5.74 17.48,5.74 20.02,5.74 27.64,5.74 32.72,5.74 35.26,5.74 3.51,8.28 6.05,8.28 2.24,10.82 17.48,10.82 36.53,13.36 11.13,18.44 31.45,18.44 30.18,20.98 32.72,20.98 31.45,23.52 4.78,26.06 7.32,26.06 14.94,26.06 25.1,26.06 30.18,26.06 3.51,28.6 6.05,28.6 16.21,28.6 2.24,31.14 4.78,31.14 7.32,31.14 9.86,31.14 12.4,31.14 14.94,31.14 25.1,31.14 30.18,31.14 35.26,31.14 37.8,31.14 3.51,33.68 11.13,33.68 26.37,33.68 28.91,33.68 31.45,33.68 36.53,33.68 41.61,33.68 7.32,36.22 9.86,36.22 12.4,36.22
NetC12_2: C12.2 U1.38 | length 3.2
  Top Layer w0.254: U1.38 21.359,24.709 21.359,25.76 21.675,26.076 21.945,26.076 22.421,25.6 C12.2
NetC13_2: C13.2 U1.37 | length 1.6
  Top Layer w0.254: U1.37@21.9,24.8 21.9,24.5 C13.2
NetC15_2: C15.2 U1.1 Y1.1 | length 7.1
  Top Layer w0.236: Y1.1 cw(c12.229,26.889) 13.8,26.889 13.8,24.383 ccw(c14.483,24.383) 14,23.9 14.232,23.668 ccw(c15,24.436) U1.1
  Bottom Layer w0.236: C15.2 11.8,28 Y1.1
NetC16_2: C16.2 U1.2 Y1.2 | length 11
  Top Layer w0.236: Y1.2 9.448,28 cw(c9.448,25.46) 11.244,27.256 12.7,25.8 cw(c11.251,24.351) 13.3,24.351 13.3,23.966 ccw(c14.666,23.966) 13.7,23 ccw(c14.062,23.362) 14.062,22.85 U1.2
  Bottom Layer w0.236: Y1.2 9.9,28 C16.2
NetC23_2: C23.2 FB2.1 IC2.6 | length 3.2
  Top Layer w1: IC2.6 11.95,14.15 FB2.1 12.1,12.74 C23.2@12.123,12.717
NetD1_2: D1.2 R11.2 | length 0.2
  Bottom Layer w0.254: v1(25,16.4) 25.1,16.4 R11.2
NetD2_2: D2.2 R12.2 | length 1.9
  Top Layer w0.254: v1(28.2,16.4) D2.2
  Bottom Layer w0.254: R12.2@27.2,16.3 27.3,16.4 v1(28.2,16.4)
NetD3_1: D3.1 R17.1 | length 1.8
  Top Layer w0.254: R17.1 10.7,9.2 D3.1@10.8,9.3
NetD3_2: D3.2 IC2.4 | length 1.8
  Top Layer w0.254: IC2.4 10.3,11.2 D3.2
NetESD1_4: ESD1.4 USB1.A7 USB1.B7 | length 5.1
  Top Layer w0.203: USB1.B7 7.045,19.36 7.305,19.1 v1(7.348,19.1) ; USB1.A7 7.203,20.36 ccw(c7.203,20.497) v1(7.3,20.4) 7.853,20.953 cw(c8.45,20.355) ESD1.4
  Bottom Layer w0.203: v1(7.3,20.4) 7.324,20.376 7.324,19.124 v1(7.348,19.1)
NetESD1_6: ESD1.6 USB1.A6 USB1.B6 | length 5.3
  Top Layer w0.152: USB1.B6 5.703,20.86 cw(c5.703,21.012) 5.677,20.862 5.467,20.898 ccw(c5.441,20.748) 5.441,20.9 ccw(c5.441,20.559) 5.2,20.8 ccw(c5.441,20.559) 5.1,20.559 5.1,20.241 ccw(c5.441,20.241) 5.2,20 ccw(c5.538,20.338) 5.538,19.86 USB1.A6 6.914,19.86 cw(c6.914,19.314) 7.3,19.7 ; 7.301,19.699 ccw(c7.407,19.808) 7.364,19.662 7.549,19.607 cw(c7.4,19.1) 7.572,19.6 ESD1.6
NetIC2_5: IC2.5 R18.2 | length 1.2
  Top Layer w0.305: v1(9.083,13.2) 9.1,13.2 IC2.5
NetJ1_3: J1.3 R4.1 R14.2 SB2.1 | length 7.6
  Top Layer w0.203: v1(35.9,26.3) 37.448,26.3 cw(c37.448,24.388) J1.3
  Bottom Layer w0.203: R4.1 v1(35.9,26.3) ; J1.3@38.414,25.98 ccw(c38.414,26.526) J1.3@38.8,26.14
  Bottom Layer w0.254: R14.2 34.15,23.2 35.327,24.377 35.527,24.377 SB2.1
  Bottom Layer w0.508: SB2.1 35.8,26.2 v1(35.9,26.3)
NetJ1_5: J1.5 P2.1 SB4.1 U1.14 | length 35.8
  Top Layer w0.203: U1.14 16.85,14.032 ccw(c19.39,14.032) 17.594,12.236 19.386,10.444 ccw(c21.182,12.24) 21.182,9.7 27.048,9.7 ccw(c27.048,12.24) 28.844,10.444 36.356,17.956 ccw(c34.56,19.752) 37.1,19.752 37.1,21.348 cw(c39.64,21.348) 37.844,23.144 38.109,23.409 cw(c38.86,22.658) J1.5@38.86,23.72
  Bottom Layer w0.203: SB4.1 38.438,23.35 cw(c38.438,22.838) J1.5
NetJ1_7: J1.7 U1.16 | length 26.6
  Top Layer w0.203: U1.16 17.85,15.502 ccw(c20.39,15.502) 18.594,13.706 18.6,13.7 ccw(c19.324,14.424) 19.324,13.4 29.248,13.4 ccw(c29.248,15.94) 31.044,14.144 v1(35.7,18.8)
  Bottom Layer w0.203: v1(35.7,18.8) 35.7,18.81 cw(c38.09,18.81) 36.4,20.5 cw(c36.786,20.114) 36.786,20.66 J1.7
NetJ1_9: J1.9 SB3.2 U1.13 | length 34.5
  Top Layer w0.203: U1.13 16.35,11.702 ccw(c18.89,11.702) 17.094,9.906 17.7,9.3 ccw(c18.424,10.024) 18.424,9 28.168,9 ccw(c28.168,11.54) 29.964,9.744 J1.9@38.86,18.64
  Bottom Layer w0.203: SB3.2 38.728,18.15 cw(c38.728,18.048) J1.9
NetJ1_13: J1.13 R13.1 U1.15 | length 24.9
  Top Layer w0.203: U1.15 17.35,15.002 ccw(c19.89,15.002) 18.094,13.206 18.356,12.944 ccw(c20.152,14.74) 20.152,12.2 23.859,12.2 cw(c23.859,11.859) R13.1 v1(29.1,12.1)
  Bottom Layer w0.203: v1(29.1,12.1) 29.207,12.1 29.307,12.2 37.049,12.2 37.96,12.2 J1.13
NetJ1_15: J1.15 R3.1 SB1.1 | length 4.3
  Bottom Layer w0.203: R3.1 35.4,9.25 36.552,10.402 36.552,10.427 SB1.1@36.925,10.8 ; SB1.1 SB1.1@36.925,10.8 ; SB1.1@36.984,10.8 SB1.1@36.925,10.8 ; J1.15 37.841,10.5 cw(c37.841,10.841) 37.6,10.6 ccw(c37.117,10.117) 37.117,10.8 SB1.1@36.925,10.8
NetJ2_3: J2.3 SB3.1 | length 22
  Bottom Layer w0.203: SB3.1 38.714,19.45 ccw(c38.714,20.986) 39.8,19.9 ccw(c39.076,20.624) 40.1,20.624 40.1,36.268 ccw(c37.56,36.268) 39.356,38.064 J2.3
NetJ2_4: J2.4 SB4.2 | length 11.8
  Bottom Layer w0.203: SB4.2 37.3,29.134 cw(c38.666,29.134) 37.7,30.1 38.116,30.516 ccw(c36.32,32.312) 38.86,32.312 J2.4
NetP1_1: P1.1 R5.1 U2.1 | length 5.6
  Top Layer w0.635: U2.1 18.995,33.305 v1(19,33.3)
  Bottom Layer w0.254: R5.1 16,33.3 P1.1
  Bottom Layer w0.635: P1.1@15.9,33.4 16,33.3 v1(19,33.3)
NetP1_2: P1.2 U1.45 | length 12
  Top Layer w0.203: P1.2 17.3,34.6 17.3,28.6 17.85,28.05 U1.45
NetP1_3: P1.3 R6.1 U3.1 | length 5.2
  Top Layer w0.254: P1.3@16.1,38.4 16.311,38.4 16.716,38.805 U3.1
  Bottom Layer w0.254: R6.1 16,38.5 P1.3
NetP2_2: P2.2 R13.2 | length 2.9
  Top Layer w0.254: P2.2 23.8,11 R13.2
NetP3_1: P3.1 U1.29 | length 4
  Top Layer w0.203: U1.29 25.35,19.85 26,19.2 P3.1@26.9,19.2
NetP3_2: P3.2 U1.30 | length 3.7
  Top Layer w0.203: U1.30 23.219,20.369 26.869,20.369 P3.2@26.9,20.4
NetP3_3: P3.3 U1.31 | length 3.9
  Top Layer w0.203: U1.31 25.95,20.85 26.7,21.6 P3.3@26.7,21.7
NetP3_4: P3.4 U1.32 | length 4.3
  Top Layer w0.203: U1.32 25.18,21.35 26.7,22.87 P3.4@26.7,23
NetR1_1: R1.1 USB1.B5 | length 4.7
  Top Layer w0.203: USB1.B5 8.46,21.86 8.9,22.3 8.9,23.325 8.723,23.502 8.723,23.577 8.475,23.825 R1.1
NetR2_1: R2.1 USB1.A5 | length 3.8
  Top Layer w0.127: USB1.A5 6.776,18.86 6.936,18.701 7.018,18.701 7.318,18.4 8.975,18.4 9.525,17.85 R2.1
NetR7_2: R7.2 USB1.S1 USB1.S2 USB1.S3 USB1.S4
  other v3: 2,17.5 2,20 2,22.5
NetR8_1: R8.1 U1.5 | length 1.6
  Top Layer w0.254: U1.5 15.009,21.359 16.559,21.359 v1(16.6,21.4)
NetR9_1: R9.1 R10.1 U2.4 | length 1.9
  Bottom Layer w0.635: v1(18.95,29.495) 20.795,29.495 R10.1@20.8,29.5
NetR9_2: R9.2 R15.2 U1.43 U2.3 U3.3 | length 14.1
  Top Layer w0.203: U1.43 18.85,27.853 20.2,29.203 20.2,30.681 20.124,30.757 ; U2.3 v1(18.958,30.757) 20.124,30.757 ; U3.3 19.418,36.265 19.601,36.082 19.601,35.741 20.129,35.214 20.129,30.763 20.124,30.757
  other v1: 18.9,36.3
NetR11_1: R11.1 U1.27 | length 2.5
  Top Layer w0.203: U1.27 24.126,18.85 24.248,18.729 24.257,18.729 25.2,17.785 v1(25.2,17.7)
NetR12_1: R12.1 U1.28 | length 4.8
  Top Layer w0.203: U1.28 24.65,19.35 26.3,17.7 v1(27.3,17.7)
NetR14_1: R14.1 SW1.1 | length 1.8
  Bottom Layer w0.254: SW1.1 34.1,25.9 R14.1
NetR15_1: R15.1 R16.1 U3.4 | length 1.7
  Bottom Layer w0.254: v1(18.9,34.9) 19,34.8 R16.1
NetSB1_2: SB1.2 U1.17 | length 19.7
  Top Layer w0.203: U1.17 18.35,16.102 ccw(c20.89,16.102) 19.094,14.306 v1(19.2,14.2)
  Bottom Layer w0.203: v1(19.2,14.2) 20.348,14.2 cw(c20.348,11.66) 22.144,13.456 23.856,11.744 ccw(c25.652,13.54) 25.652,11 SB1.2@35.3,11
NetSB2_2: SB2.2 U1.18 | length 23
  Top Layer w0.203: U1.18 18.85,16.328 ccw(c19.053,16.328) 18.853,16.295 18.976,15.539 ccw(c19.35,15.6) 19.076,15.338 v1(19.4,15)
  Bottom Layer w0.203: v1(19.4,15) 29.248,15 ccw(c29.248,17.54) 31.044,15.744 35.056,19.756 ccw(c33.26,21.552) 35.8,21.552 SB2.2
NetU1_44: U1.44 U2.2 U3.2 | length 15.2
  Top Layer w0.203: U1.44 18.35,28.025 17.771,28.604 17.771,31.506 18.3,32.035 U2.2@18.482,32.035 ; U2.2 U2.2@18.482,32.035 ; U3.2 18.235,37.535 17.7,37 17.7,33.157 18.299,32.559 18.299,32.218 U2.2@18.482,32.035
USB_N: ESD1.3 U1.6 | length 4.4
  Top Layer w0.236: ESD1.3 11.232,21.018 ccw(c11.399,21.185) 11.299,20.971 11.727,20.773 cw(c11.625,20.55) 11.861,20.616 ccw(c12.088,20.68) 12.088,20.444 12.5,20.444 ccw(c12.5,21.042) 12.922,20.619 cw(c13.344,20.197) 13.344,20.794 13.987,20.794 ccw(c13.987,20.89) 14.055,20.822 cw(c14.122,20.755) 14.122,20.85 U1.6
USB_P: ESD1.1 U1.7 | length 4.4
  Top Layer w0.236: ESD1.1 11.232,19.482 cw(c11.399,19.315) 11.299,19.529 11.728,19.728 ccw(c11.625,19.95) 11.861,19.884 cw(c12.088,19.82) 12.088,20.056 12.66,20.056 ccw(c12.66,20.653) 13.083,20.231 cw(c13.505,19.808) 13.505,20.406 13.987,20.406 cw(c13.987,20.31) 14.055,20.378 ccw(c14.122,20.445) 14.122,20.35 U1.7
VCC: C7.2 C8.2 C21.2 C22.2 ESD1.5 IC2.1 R17.2 USB1.A4_B9 USB1.B4_A9 | length 25
  Top Layer w0.254: v1(7.7,14.15) 7.925,14.15 8.15,14.15 8.529,13.771 8.529,12.771 9,12.3 R17.2
  Top Layer w0.635: USB1.A4_B9 7.46,17.66 v1(7.5,17.7) v1(8.3,17.7) ; USB1.B4_A9 7.36,22.56 v1(7.4,22.6) v1(8.2,22.6)
  Top Layer w1: C22.2@4.887,14.127 5.35,14.127 6.1,14.127 6.8,14.127 7.677,14.127 v1(7.7,14.15)
  Bottom Layer w0.635: C8.2 v1(8.46,20.2) C7.2
  Bottom Layer w1: v1(7.4,22.6) v1(8.2,22.6) 8.2,21.3 8.3,21.2 v1(8.3,17.7) v1(7.5,17.7)
  Bottom Layer w1.27: v1(5.35,14.15) v1(7.7,14.15) 8.3,14.75 v1(8.3,17.7)
  other v1: 6.8,14.1
VPHY: C1.2 C2.2 C3.2 FB3.2 U1.3 | length 4.9
  Top Layer w0.254: C2.2 13.081,22.359 14.991,22.359 U1.3
  Top Layer w0.508: C3.2 11.804,23.896 11.804,22.556 11.86,22.5 C1.2 12.944,22.5 13,22.444 C2.2
  other v4: 11.5,24.1
VPLL: C4.2 C5.2 C6.2 FB1.2 U1.8 | length 8.5
  Top Layer w0.236: U1.8 16.36,19.85 v1(16.36,19.9)
  Top Layer w0.254: FB1.2 11.6,16.8 12.3,17.5 12.3,18.399 12.778,18.877 12.917,18.877 13.1,19.06 C4.2 13.1,19.1 13.841,19.841 14.991,19.841 U1.8
  Bottom Layer w0.635: C6.2 15.1,19.05 15.95,19.9 v1(16.36,19.9)
pads on no net: J1.1 J1.2 J1.11 J1.17 SW1.2 U1.19 U1.20 U1.21 U1.25 U1.26 U1.33 USB1.57 USB1.A8 USB1.B8

## Polygon pours and split planes (outlines as drawn)
NetR7_2 on Bottom Layer "NONET_L01_P-001" (solid, pour order 0): 0.2,25.7 0.2,14.3 3.4,14.3 3.4,25.7
GND on Bottom Layer "NONET_L01_P-001" (solid, pour order 4): 0.043,0.018 0.043,40.018 45.043,40.018 45.043,0.018
GND on Top Layer "NONET_L01_P-001" (solid, pour order 2): 0,0 0,40 45,40 45,0
NetR7_2 on Top Layer "NONET_L01_P-001" (solid, pour order 1): 0,25.4 5.9,25.4 6.5,24.8 6.5,24.1 6.3,23.9 5.3,23.9 4.4,23 4.4,17.2 5.2,16.4 6.3,16.4 6.5,16.2 6.5,15 4.3,15 3.7,14.4 2.6,14.4 2,15 0,15

## Silkscreen, mask and mechanical layers (free items; w line width, h text height)
Top Overlay:
  circle w1: c37.5,31.4 r1.1
  circle w1: c34.4,34.9 r1.1
  rectangle: 34.1,14.6 35.57,19.1
  lines w0.16: 0,1.5 0,38.5 ; 1.5,0 43.5,0 ; 1.5,40 43.5,40 ; 8,16.4 8.8,18.3 ; 9.454,14.687 9.9,14.8 ; 11.9,25 12.3,25.2 13.6,25.2 ; 14.1,16.1 14.6,15.5 ; 14.7,13.8 15.2,13.4 ; 22.3,27.8 24.2,28.7 ; 45,1.5 45,38.5 ; 9.5,19 9.5,19.2 10,19.2 10,19 9.5,19
  lines w0.2: 0,1.5 ccw(c1.5,1.5) 1.5,0 ; 0,38.5 cw(c1.5,38.5) 1.5,40 ; 43.5,0 ccw(c43.5,1.5) 45,1.5 ; 43.5,40 cw(c43.5,38.5) 45,38.5
  text "JTAG (2)" at 5.801,37.9 h1.2
  text "UART (1)" at 5.801,32.5 h1.2
  text "RX" at 23.142,13.625 h1.75
  text "TX" at 28.242,13.625 h1.75
  text "SWD" at 17.467,7.425 h1.75
  text "GND" at 21.104,1.611 h1.75 r90
  text "P.S. 2020 / V1.0" at 3.11,0.616 h1.1
Bottom Overlay:
  text "USB->UART/JTAG" at 0.578,7.95 h1.5 r180
Top Solder:
  rectangle: 3.1,16.5 3.995,23.5
  region: 3.2,25.2 0.2,25.2 0.2,15.2 3.2,15.2
Bottom Solder:
  rectangle: 0.2,15.2 3.2,25.2

## Text inside footprints (layer, text, board x,y; h text height)
J1: Top Overlay "19" at 38.33,4.16 h1.02 r270; Top Overlay "20" at 40.87,4.16 h1.02 r270; Top Overlay "1" at 38.27,29.84 h1.02 r270; Top Overlay "2" at 40.81,30.14 h1.02 r270
J2: Top Overlay "1" at 43.53,39.09 h1.02 r180; Top Overlay "2" at 43.83,36.39 h1.02 r180; Top Overlay "3" at 37.13,39.09 h1.02 r180; Top Overlay "4" at 37.13,36.39 h1.02 r180
J3: Top Overlay "1" at 26.03,0.43 h1.02 r90; Top Overlay "2" at 23.33,0.13 h1.02 r90; Top Overlay "3" at 26.03,6.83 h1.02 r90; Top Overlay "4" at 23.33,6.83 h1.02 r90